# Altium PCB H10R7.PcbDoc (part 2 of 2)
Units mil, origin at the board's own origin, x right, y up, seen from the top; angles counter-clockwise.
Board outline 2362.2 x 1363.78 mil, 2 copper layers (Top Layer, Bottom Layer); 51 components, 28 nets, 147 pads, 28 vias.
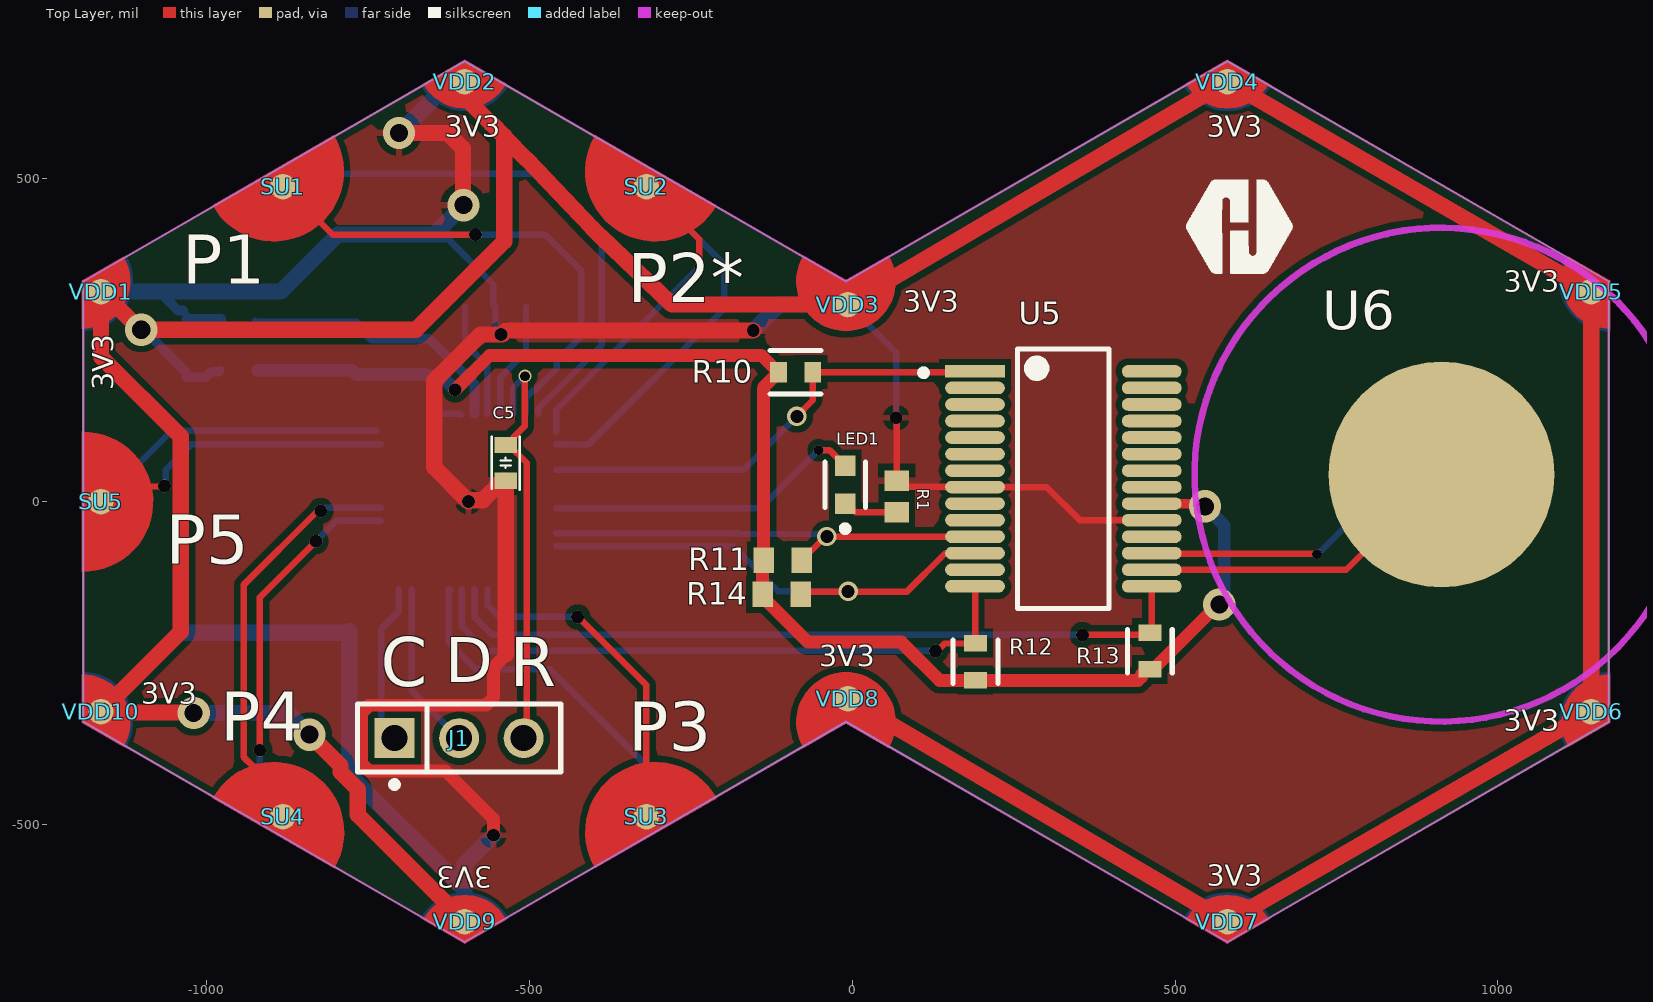
[diagram p0: Top Layer view]

## Part data (continued)
U5: library part CMP-015-00008-1, "Sensor Controller Capacitive 15-Ch Serial I2C 28-Pin SSOP Tube", Case/Package=SSOP, Max Operating Temperature=85°C, Max Supply Current=1.17mA, Max Supply Voltage=3.6V, Min Operating Temperature=-40°C, Min Supply Voltage=1.8V, Interface="2-Wire, I2C", Mounting Technology="Surface Mount", Number of Channels=15, Pins=28, RoHS=Compliant
U6: library part CMP-010-00025-1, "1 button touch sensor with shield"
VDD1 VDD2 VDD4 VDD5 VDD6 VDD7 VDD9 VDD10: library part HEXABIT_POWER_PORT_U
VDD3: library part HEXABIT_POWER_PORT_U_300R
VDD8: library part HEXABIT_POWER_PORT_U_300L
X1: "Ceramic Resonator 8MHz ±0.5% (Tol) ±0.2% (Stability) 10pF 40Ohm 3-Pin CSMD T/R", Case Code (Imperial)=1206, Case Code (Metric)=3216, Frequency=8MHz, Frequency Stability=0.2%, Frequency Tolerance=0.5%, Load Capacitance=10pF, Manufacturer=Murata, Max Operating Temperature=125°C, Min Operating Temperature=-40°C, Package Quantity=1, Case/Package=1206, Category=Capacitors, Contact Plating=Gold, Height=0.031inch, Impedance=40R, Length=3.2mm, Library=Hexabitz, Manufacturer Part Number=CSTCE8M00G52Z-R0, Mounting Technology="Surface Mount", Packaging="Tape and Reel", Pins=3, RoHS Compliant=Yes, Self Resonant Frequency=8MHz, Series=CERALOCK®, Termination=SMD/SMT, Tolerance=0.5%, Width=1.3mm

## Via types
v1: diameter 20, hole 20, Top Layer to Bottom Layer, tented top, 13 vias
v2: diameter 50, hole 28, Top Layer to Bottom Layer, tented top, 5 vias
v3: diameter 30, hole 20, Top Layer to Bottom Layer, tented top, 3 vias
v4: diameter 15, hole 15, Top Layer to Bottom Layer, tented top, 3 vias
v5: diameter 50/50 (per signal layer), hole 28, Top Layer to Bottom Layer, tented top, 2 vias
v6: diameter 20, hole 15, Top Layer to Bottom Layer, tented top, 1 vias
v7: diameter 20/20 (per signal layer), hole 20, Top Layer to Bottom Layer, tented top, 1 vias

## Nets (pads, with @x,y where several pads share a name; then routed paths per layer and width w, separated by ;. In a path a pad name is that pad's centre, name@x,y a point inside that pad or via, vN(x,y) a via of type N, cw(c..) or ccw(c..) an arc to the next point about the centre after c; other vN are vias at no path point)
CLK_BOOT: J1.1 R3.1 U1.36 | length 247.2
  Bottom Layer w10: R3.1 -729.39,-345.34 J1.1 ; R3.1@-729.39,-197.05 -702.27,-169.92 U1.36@-702.27,-135.83
DATA: J1.2 U1.35 | length 261.1
  Bottom Layer w10: U1.35@-682.21,-135.54 -682.21,-292.52 J1.2
GND: C5.1 D1.1 GND1.Pwr_D GND2.Pwr_D GND3.Pwr_D GND4.Pwr_D GND5.Pwr_D GND6.Pwr_D GND7.Pwr_D GND8.Pwr_D GND9.Pwr_D GND10.Pwr_D R1.1 R2.1 R3.2 U1.49 U5.8 U5.19 X1.P$2 | length 8251.5
  Top Layer w10: v1(-594.11,0.28) v1@-592.2,2.2 ; v1(-543.39,258.96) v1@-541.66,258.96 ; C5.1@-541.33,32.6 C5.1 ; v1@67.88,130.79 69.1,129.57 R1.1 78.36,23.39 189.49,23.39 U5.8 301.57,22.54 352.75,-28.64 U5.19
  Top Layer w20: v1(-555.42,-516.52) -555.42,-491.3 -629.66,-417.06 -747.77,-417.06 -759.48,-405.35 -759.48,-326.97 -747.77,-315.25 -567.14,-315.25 -555.42,-303.53 -555.42,-256.54 -534.3,-235.43
  Top Layer w25: v2(-701.51,570.88) -626.31,570.88 -602.75,547.32 v2@-602.75,458.64 ; v1(-594.11,0.28) -647.14,53.31 -647.14,186.87 -575.05,258.96 v1(-543.39,258.96) -541.66,258.96 -535.76,264.86 v1(-153.08,264.86) ; v1@-592.2,2.2 -571.73,2.2 C5.1@-541.33,32.6 ; -536.41,-236.65 C5.1
  Bottom Layer w10: D1.1@-1036.06,296 -1031.21,291.16 D1.1 ; R2.1@-976.89,283.28 R2.1 ; R3.2@-781.56,-202.95 R3.2 ; -652.45,413.79 -647.09,413.79 ; -632.84,413.79 -555.67,336.62 -555.67,304.58 -552.18,301.09 -552.18,271.01 -545.31,264.14 -545.31,260.87 v1(-543.39,258.96) ; GND9.Pwr_D GND9.Pwr_D@-600,-642.44 ; GND3.Pwr_D 68.17,230.42 v1(68.17,129.96)
  Bottom Layer w15: -1073.13,325.2 -1043.93,296 D1.1@-1036.06,296 ; D1.1 R2.1@-976.89,283.28
  Bottom Layer w25: GND10.Pwr_D -1041.01,-202.95 R3.2@-781.56,-202.95 ; GND1.Pwr_D -1073.13,325.2 -884.46,325.2 -795.87,413.79 -652.45,413.79 ; R3.2 -778.61,-422.65 -600,-601.25 ; v2(-701.51,570.88) -644.36,628.02 -629.88,636.38 GND2.Pwr_D ; -632.84,413.79 -647.09,413.79 v2(-601.77,459.11) ; GND9.Pwr_D@-600,-642.44 -600,-601.25 ; v1(-555.42,-516.52) -600,-561.1 -600,-601.25 ; v1(-153.08,264.86) -112.74,305.2 GND3.Pwr_D GND4.Pwr_D GND5.Pwr_D GND6.Pwr_D GND7.Pwr_D GND8.Pwr_D
INT: R11.1 U1.21 U5.11 | length 704.6
  Top Layer w10: R11.1 -41.47,-54.23 U5.11
  Bottom Layer w10: U1.21 -175.8,-48.93 -174.69,-50.04 -42.98,-50.04 v3(-39.16,-53.86)
NetLED1_1: LED1.1 R1.2 | length 85.4
  Top Layer w10: LED1.1 -0.05,-14.14 3.38,-14.14 5.81,-16.57 R1.2
NetLED1_2: LED1.2 U1.19 | length 496
  Top Layer w10: v4@-53.63,79.95 -35.08,79.95 LED1.2
  Bottom Layer w10: U1.19@-458.17,-9.84 -141.67,-9.84 v4(-52.15,79.68)
NetR10_1: R10.1 U1.16 U5.1 | length 738.5
  Top Layer w10: v3@-86.57,131.27 -60.85,156.99 R10.1 189.04,200.38 U5.1
  Bottom Layer w10: U1.16 -167.99,49.5 v3(-85.5,131.98)
NetU1_8: U1.8 X1.P$3 | length 179.3
  Bottom Layer w10: X1.P$3@-599.42,301.09 -599.42,245.03 -564.79,210.4 U1.8@-564.79,136.11
NetU1_9: U1.9 X1.P$1 | length 181.8
  Bottom Layer w10: U1.9@-544.79,135.83 -544.79,192.15 -504.94,232 X1.P$1@-504.94,301.09
NetU5_16: U5.16 U6.1 | length 509.7
  Top Layer w10: U5.16 765.2,-105.41 U6.1
NetU5_17: U5.17 U6.2 | length 500.4
  Top Layer w10: U5.17 464.77,-80.62 718.96,-80.62 v4(719.76,-81.42)
  Bottom Layer w10: v4(719.76,-81.42) 721.11,-81.42 844.53,42 U6.2
NRST: C5.2 J1.3 U1.10 | length 653.9
  Top Layer w10: C5.2 C5.2@-531.49,87.72 ; J1.3 -503.89,-361.47 -503.89,60.12 C5.2@-531.49,87.72 ; v6@-507.15,193.57 -507.15,116.98 -523.89,100.24 -523.89,95.32 C5.2@-531.49,87.72
  Bottom Layer w10: U1.10@-524.79,136.11 -524.79,176.26 v6(-506.66,194.39)
SCL: R12.1 U1.31 U5.14 | length 961.7
  Top Layer w10: v1(129.09,-231.14) 131.8,-231.14 143.29,-219.65 190.52,-219.65 R12.1 ; R12.1@190.34,-218.78 U5.14
  Bottom Layer w10: U1.31@-604.27,-135.54 -604.27,-193.03 -566.11,-231.19 v1@129.36,-231.19
SDA: R13.1 U1.30 U5.15 | length 1174.7
  Top Layer w10: v1(356.64,-206.19) 457.61,-206.19 R13.1 463.97,-199.83 U5.15
  Bottom Layer w10: U1.30 -584.27,-179.51 -557.59,-206.19 v1(356.64,-206.19)
SYNC: R14.1 U1.22 U5.12 | length 777.4
  Top Layer w10: R14.1 -75.86,-139.8 84.39,-139.8 143.52,-80.67 149.38,-80.67 150.23,-79.82 U5.12
  Bottom Layer w10: U1.22@-458.29,-68.93 -184.08,-68.93 -114.21,-138.8 v3(-6.04,-138.8)
UART1_RX: SD3.UART_D U1.32 | length 549.9
  Bottom Layer w10: U1.32@-624.59,-135.54 -624.59,-217.52 -582.82,-259.29 -467.74,-259.29 -318.5,-408.54 SD3.UART_D ; U1.32 U1.32@-621.23,-137.95
UART1_TX: SU3.UART_U U1.29 | length 526.7
  Top Layer w10: v1@-425.71,-177.16 -318.5,-284.37 SU3.UART_U
  Bottom Layer w10: U1.29 -564.59,-159.8 -545.85,-178.53 v1(-424.91,-178.53)
UART2_RX: SD2.UART_D U1.14 | length 586.1
  Bottom Layer w10: U1.14@-458.17,88.58 -434.01,88.58 ; -433.8,88.54 -408.14,88.54 -197.93,298.75 -197.93,367.23 SD2.UART_D
UART2_TX: SU2.UART_U U1.13 | length 505
  Top Layer w10: SU2.UART_U -236.89,406.19 v4(-236.89,363.6)
  Bottom Layer w10: U1.13@-458.17,108.27 -458.17,142.32 v4(-236.89,363.6)
UART3_RX: SD5.UART_D U1.48 | length 473
  Bottom Layer w10: SD5.UART_D -1053.62,109.77 U1.48@-735.83,109.77
UART3_TX: SU5.UART_U U1.47 | length 483.8
  Top Layer w10: SU5.UART_U -1112.09,0 -1088.62,23.47 -1065.3,23.47 v1(-1064.65,24.12)
  Bottom Layer w10: v1(-1064.65,24.12) -1062.77,26.01 -1062.77,49.12 -1023.02,88.87 U1.47
UART4_RX: SD1.UART_D U1.12 | length 853.4
  Bottom Layer w10: SD1.UART_D -880.83,487.8 -860.96,507.67 -492.26,507.67 -387.76,403.17 -387.76,242.24 -468.31,161.69 -468.65,161.69 -485.73,144.61 U1.12@-485.73,135.83
UART4_TX: SU1.UART_U U1.11 | length 775.1
  Top Layer w10: SU1.UART_U -878.36,487.8 -804.05,413.49 v1(-583.18,413.51)
  Bottom Layer w10: v1(-583.18,413.51) -474.92,413.51 -419.15,357.74 -419.15,256.19 -457.29,218.05 -457.29,205.98 -490.46,172.81 -493,172.81 -505.53,160.28 U1.11
UART5_RX: SD4.UART_D U1.41 | length 590.8
  Top Layer w10: v7(-917.27,-384.9) -917.27,-148.32 v1(-830.26,-61.32)
  Bottom Layer w10: v7(-917.27,-384.9) -917.27,-413.03 -881.5,-448.8 SD4.UART_D ; v1(-830.26,-61.32) -798.5,-29.56 U1.41@-729.94,-29.56
UART5_TX: SU4.UART_U U1.42 | length 656.7
  Top Layer w10: SU4.UART_U -881.5,-437.36 -908.74,-410.12 -927.4,-410.12 -942.27,-395.25 -942.27,-128.96 -829.67,-16.37 -827.56,-16.37 -825.46,-14.27 v1(-822.75,-14.27)
  Bottom Layer w10: v1(-822.75,-14.27) -820.04,-14.27 -815.34,-9.56 U1.42
VDD: D1.2 FB1.1 VDD1.Pwr_U VDD2.Pwr_U VDD3.Pwr_U VDD4.Pwr_U VDD5.Pwr_U VDD6.Pwr_U VDD7.Pwr_U VDD8.Pwr_U VDD9.Pwr_U VDD10.Pwr_U | length 6625.9
  Top Layer w10: VDD10.Pwr_U VDD10.Pwr_U@-1162.25,-326.21 ; VDD1.Pwr_U VDD1.Pwr_U@-1161.49,325.2 ; v5@-1020.66,-326.21 v5(-1019.66,-327.21) ; -600,626.13 VDD2.Pwr_U -594.38,644.77 -594.38,626.13
  Top Layer w25: VDD10.Pwr_U -1039.65,-201.59 -1039.65,100.9 -1163.26,224.5 VDD1.Pwr_U ; VDD10.Pwr_U@-1162.25,-326.21 v5@-1020.66,-326.21 ; VDD1.Pwr_U@-1161.49,325.2 -1102.56,266.28 v2(-1100.79,266.28) -675.47,266.28 -538.62,403.13 -538.62,564.75 ; v5@-841.11,-360.45 -840.46,-360.45 -791.98,-408.92 -791.98,-418.81 -765.52,-445.27 -765.52,-484.87 VDD9.Pwr_U ; -600,626.13 -559.04,585.17 -538.62,564.75 ; -558.36,585.85 -538.62,566.11 -538.62,564.75 ; VDD8.Pwr_U VDD7.Pwr_U VDD6.Pwr_U VDD5.Pwr_U VDD4.Pwr_U VDD3.Pwr_U -268.71,305.2 -279.07,305.2 -389.29,410.44 -402.48,423.62 -503.62,529.75 -538.62,564.75
  Bottom Layer w10: FB1.1@-980.19,201.37 FB1.1
  Bottom Layer w15: v2(-1100.79,266.28) -1096.89,266.28 D1.2@-1031.21,200.6 ; D1.2 -1000.22,192.73 -991.59,201.37 FB1.1@-980.19,201.37
  Bottom Layer w25: v5(-1019.66,-327.21) -873.69,-327.21 v5(-840.06,-360.84)
VDDA: C1.2 C2.1 C3.2 C4.2 FB1.2 R10.2 R11.2 R12.2 R13.2 R14.2 U1.4 U1.5 U1.6 U5.20 | length 2377.9
  Top Layer w10: R14.2@-138.59,-147.41 R14.2 ; R13.2@448.34,-267.62 456.14,-259.83 R13.2@465.98,-259.83 ; v2@539.66,-3.05 543.79,-7.18 v2(546.5,-7.18)
  Top Layer w15: 442.49,-277.03 R13.2@448.34,-271.17 ; U5.20 v2@539.66,-3.05
  Top Layer w20: v1(-614.64,173.27) -561.46,226.46 -140.22,226.46 -120.12,206.36 -117.1,206.36 -114.14,203.4 R10.2 -136.57,177.94 ; R14.2@-138.59,-147.41 -68.4,-217.6 76.18,-217.6 135.61,-277.03 191.33,-277.03 442.49,-277.03 ; R14.2 R11.2@-138.59,-90.72 ; R11.2 -137.01,174.48 ; R13.2@448.34,-271.17 R13.2@448.34,-267.62 ; R13.2@465.98,-259.83 v2@568.83,-156.97
  Bottom Layer w10: FB1.2 FB1.2@-919.94,203.5 ; C2.1 C2.1@-767.57,197.07 ; C1.2@-654.67,197.07 C1.2@-643.33,185.72 ; U1.4 U1.5 -606.89,136.11 U1.6@-605.18,134.39
  Bottom Layer w15: U1.4 C1.2@-643.33,185.72
  Bottom Layer w20: FB1.2@-919.94,203.5 C4.2 C2.1 ; C2.1@-767.57,197.07 C3.2 C1.2 -657,194.47 -635.85,194.47 v1(-614.64,173.27) ; v2(546.5,-7.18) 576.23,-36.92 576.23,-143.54 568.59,-151.18 v2(568.59,-159.3)
VSSA: C1.1 C2.2 C3.1 C4.1 R2.2 U1.7 | length 426.3
  Bottom Layer w10: R2.2 R2.2@-920.89,276.5 ; C2.2 C2.2@-768,276.5 ; C1.1 C1.1@-654.67,252.19
  Bottom Layer w15: R2.2@-920.89,276.5 C4.1 C2.2 ; C2.2@-768,276.5 -743.69,252.19 C3.1 C1.1 ; C1.1@-654.67,252.19 -584.79,182.3 U1.7@-584.79,136.11
pads on no net: U1.1 U1.2 U1.3 U1.15 U1.17 U1.18 U1.20 U1.23 U1.24 U1.25 U1.26 U1.27 U1.28 U1.33 U1.34 U1.37 U1.38 U1.39 U1.40 U1.43 U1.44 U1.45 U1.46 U5.2 U5.3 U5.4 U5.5 U5.6 U5.7 U5.9 U5.10 U5.13 U5.18 U5.21 U5.22 U5.23 U5.24 U5.25 U5.26 U5.27 U5.28

## Polygon pours and split planes (outlines as drawn)
GND on Top Layer "GND_L01_P010" (solid, remove dead copper, pour order 10): -1190.55,-340.94 -600,-681.89 -9.45,-340.94 581.1,-681.89 1171.65,-340.94 1171.65,340.94 581.1,681.89 -9.45,340.94 -600,681.89 -1190.55,340.94
GND on Bottom Layer "GND_L02_P013" (solid, remove dead copper, pour order 3): -1190.55,-340.94 -600,-681.89 -9.45,-340.94 581.1,-681.89 1171.65,-340.94 1171.65,340.94 581.1,681.89 -9.45,340.94 -600,681.89 -1190.55,340.94

## Keep-outs
Top Layer:
  circle w10: c912.61,42 r382.49
  lines w10: 540.82,128.72 cw(c912.61,42) 1294.38,42
Bottom Layer:
  circle w10: c912.61,42 r381.22
Keep-Out Layer:
  the board outline again, w3.94

## Silkscreen, mask and mechanical layers (free items; w line width, h text height)
Top Overlay:
  drawing of 1337 lines, arcs and shapes, not listed
  text "3V3" at -631,565.01 h32
  text "3V3" at 549,565.01 h32
  text "P1" at -1037.51,337.65 h76
  text "3V3" at 1009,325.01 h32
  text "P2*" at -347.76,308.57 h76
  text "3V3" at 79.26,294.01 h32
  text "3V3" at -1144.32,172.87 h32 r90
  text "P5" at -1062.66,-96.08 h76
  text "3V3" at -51,-254.99 h32
  text "D" at -630,-279.99 h70
  text "C" at -730,-285.98 h76
  text "R" at -530,-285.98 h76
  text "3V3" at -1100.93,-312.71 h32
  text "3V3" at 1009,-354.99 h32
  text "P4" at -978.43,-370.37 h76
  text "P3" at -346.91,-386.03 h76
  text "3V3" at -557,-565.01 h32 r180
  text "3V3" at 549,-594.99 h32
Bottom Overlay:
  text "GND" at -631,594.99 h32 r180
  text "GND" at 549,594.99 h32 r180
  text "P1" at -687.04,415.98 h76
  text "H10R7" at 422.73,392.16 h70
  text "GND" at 75.05,326.89 h32 r180
  text "GND" at 1083,325.01 h32
  text "P2*" at -234.46,309.19 h76
  text "U6" at 815.72,265.6 h60
  text "GND" at -1145.21,255.39 h32 r90
  text "P5" at -956.68,-99.75 h76
  text "GND" at -51,-225.01 h32 r180
  text "GND" at -1015.63,-312.71 h32
  text "GND" at 1083,-354.99 h32
  text "P4" at -874.5,-371.1 h76
  text "P3" at -233.64,-392.11 h76
  text "GND" at 549,-545.01 h32 r180
  text "GND" at -651,-565.01 h32 r180
Top Solder:
  drawing of 17 lines, arcs and shapes, not listed
Bottom Solder:
  drawing of 17 lines, arcs and shapes, not listed
Dimensions:
  lines w3.94: -3.06,-340.94 -593.61,-681.89 -1184.16,-340.94 -1184.16,340.94 -593.61,681.89 -3.06,340.94

## Text inside footprints (layer, text, board x,y; h text height)
C2: Mechanical 32 "2" at -774,266.5 h25 r270; Mechanical 32 "1" at -774,193.5 h25 r270; Mechanical 33 "C40" at -781.17,313.5 h25 r270
C4: Mechanical 32 "1" at -859,286.5 h25 r90; Mechanical 32 "2" at -859,213.5 h25 r90; Mechanical 33 "C40" at -851.83,166.5 h25 r90